# Allegro board B07_1030.brd
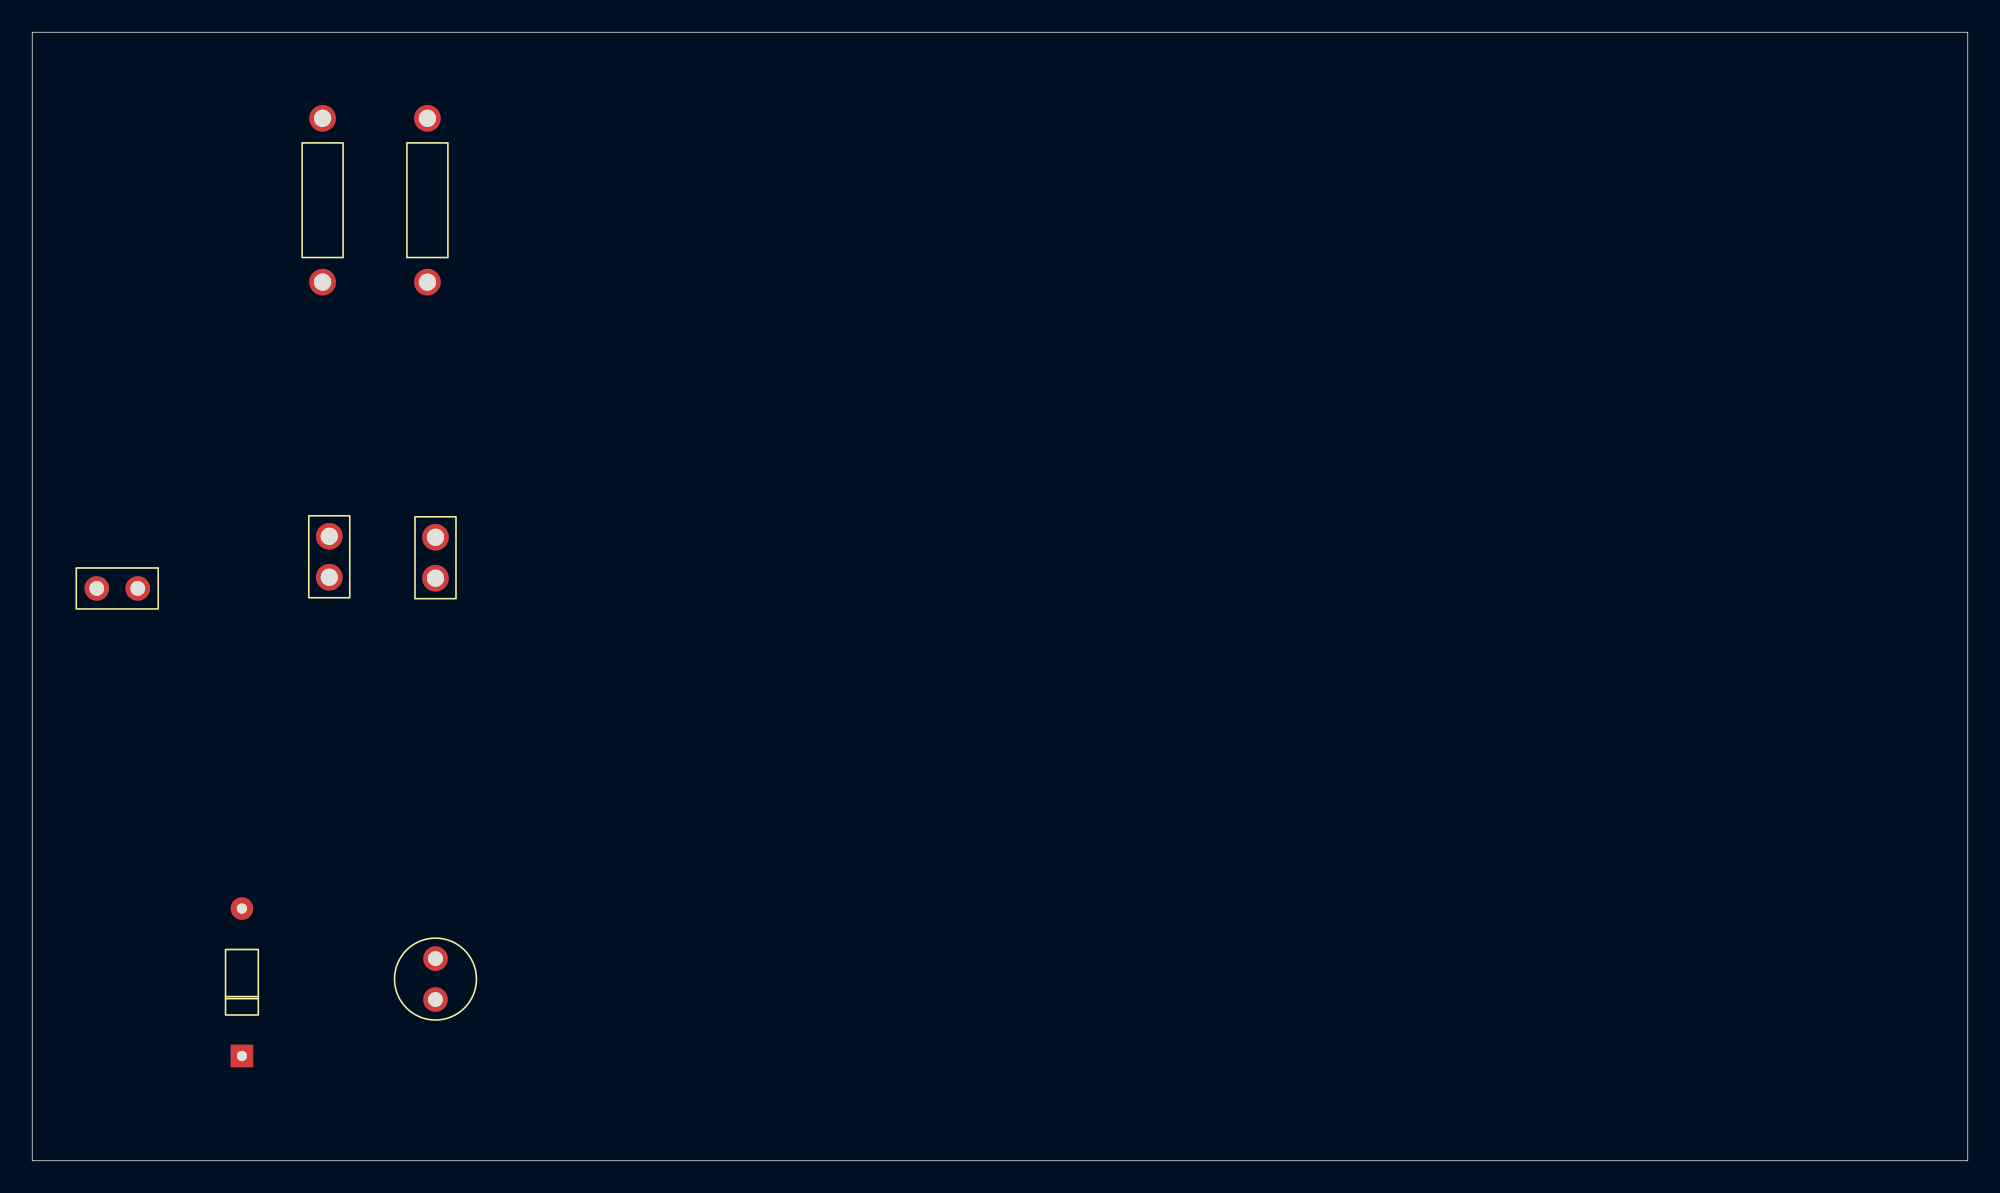
[diagram p0: board, top side]
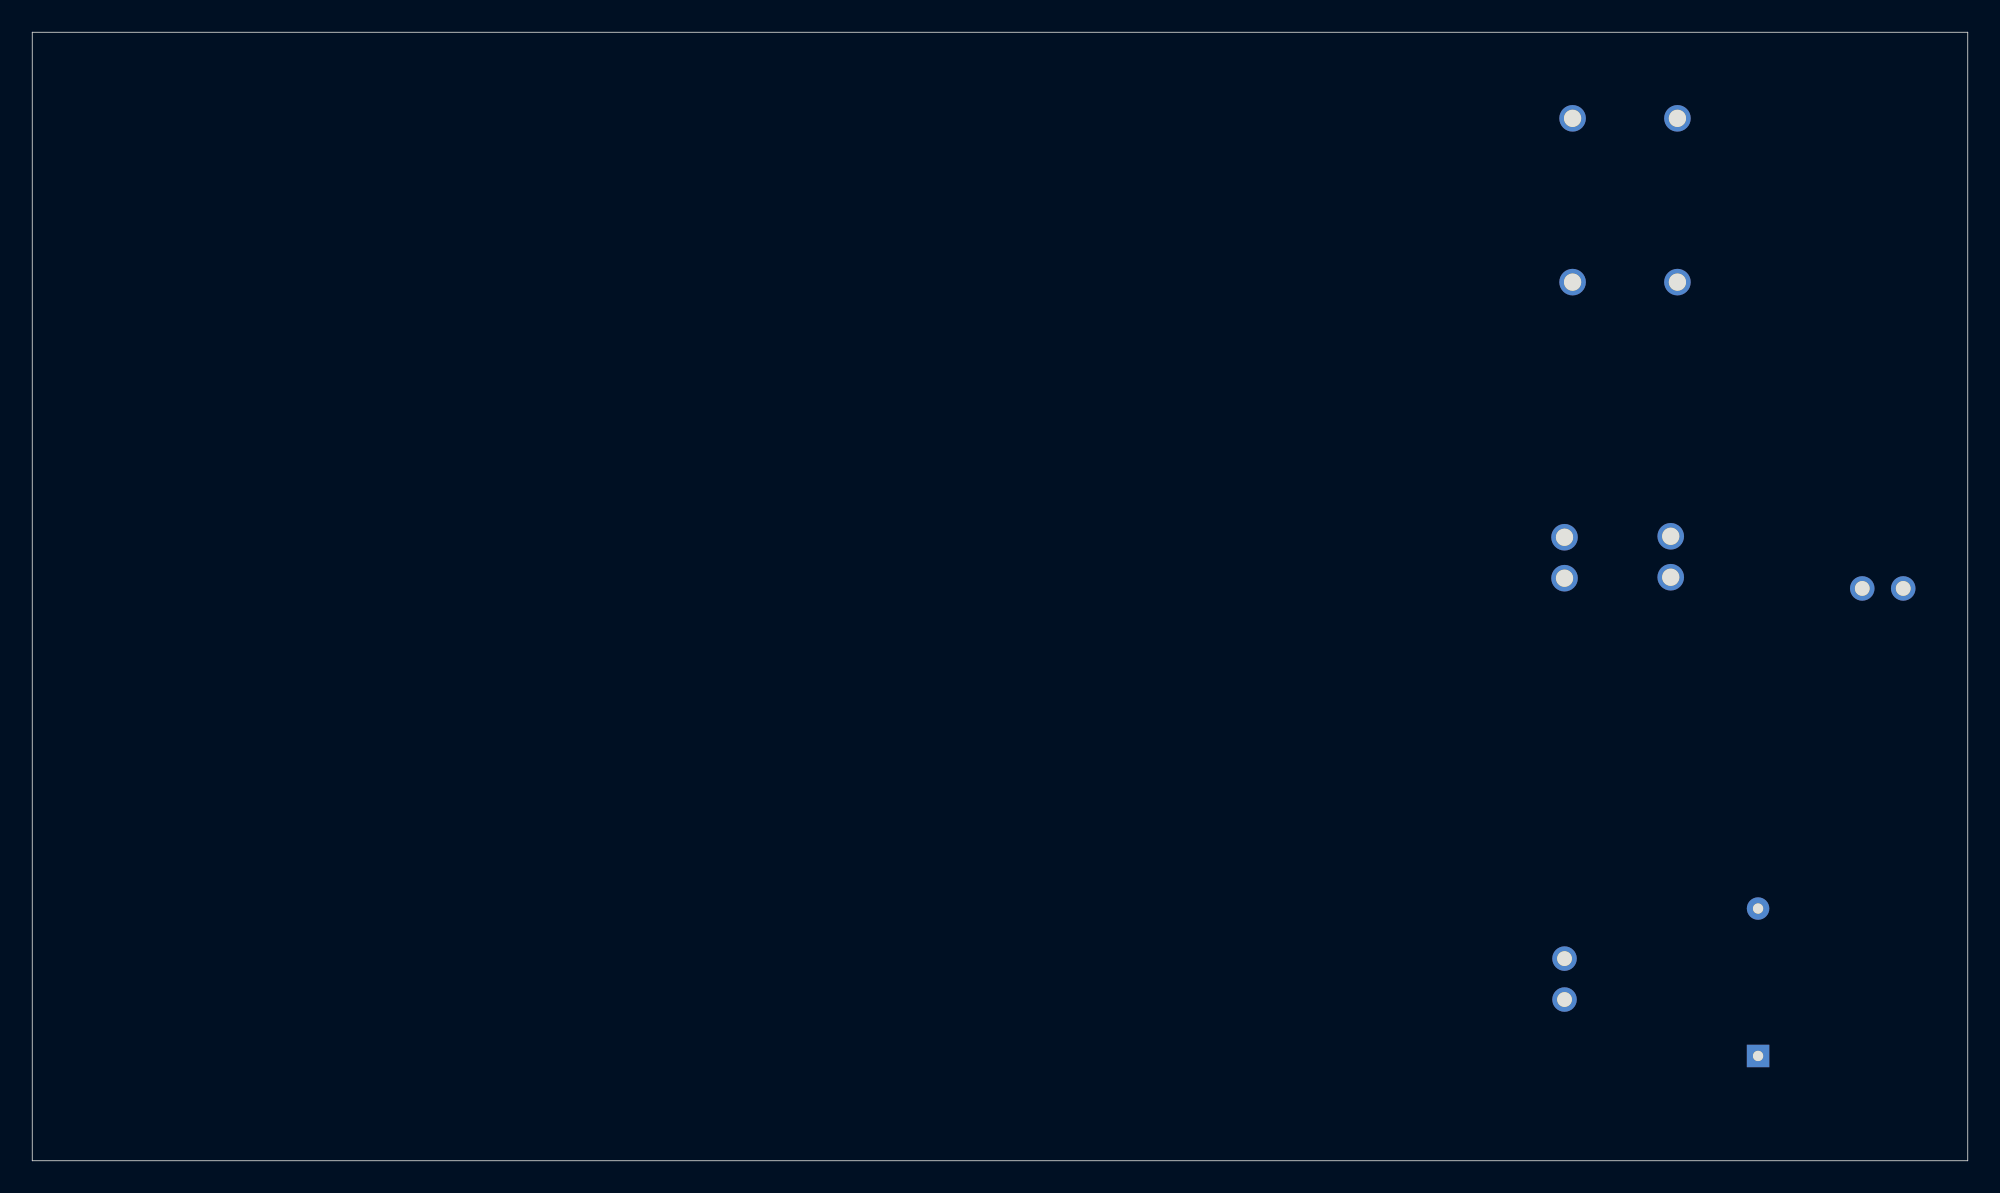
[diagram p1: board, bottom side, seen from below]

Outline 120 x 70 mm; copper layers: TOP, BOTTOM. Coordinates in mm from the lower left corner of the outline.
Outline path: 0,70 0,0 120,0 120,70 0,70

## Design rules (mm)
constraint set DEFAULT: min track width 0.5
nets with their own width: min track width 1; nets +5V GND

## Placement (name value [footprint] x y rotation side)
C1  CAP NP  [CAPCK05]  18.41 36.2 0 top
C2  CAP NP  [CAPCK05]  25 36.13 0 top
C3  CAP  [CAP196]  25 10 0 top
D13  LED  [DO35]  13 6.5 0 top
J1  CON2  [JUMPER2]  4 35.5 0 top
NOREF  -  []  0 33.06 0 top
NOREF#2  -  []  44.1 0 90 top
R1  R  [RES400]  18 54.5 0 top
R2  R  [RES400]  24.5 54.5 0 top

## Library data of the parts
C1 C2 = CAP NP: Tolerance: ***; User Part Number: ***
C3 = CAP: Tolerance: ***; User Part Number: ***
D13 = LED
J1 = CON2: User Part Number: ***
R1 R2 = R: Tolerance: ***; User Part Number: ***

## Footprints (pads in the part's own frame, mm; a bottom-side part is the same pattern mirrored in y, then rotated)
CAP196
  round 1.524 hole 0.914: 1(0,0) 2(0,2.54)
CAPCK05
  round 1.651 hole 1.067: 1(0,0) 2(0,2.54)
DO35
  rect 1.397x1.397 hole 0.635: 1(0,0)
  round 1.397 hole 0.635: 2(0,9.144)
JUMPER2
  round 1.524 hole 0.914: 1(0,0) 2(2.54,0)
RES400
  round 1.651 hole 1.067: 1(0,0) 2(0,10.16)

## Nets
+5V: C3.1 D13.1(CATHODE) R1.1
GND: C1.2 C2.2 C3.2 J1.2
N00818: R1.2 R2.1
N00842: C1.1 R2.2
N00950: C2.1
N02219: D13.2 J1.1
